# Altium PCB Fingerboardv2.PcbDoc
Units mil, origin at the board's own origin, x right, y up, seen from the top; angles counter-clockwise.
Board outline 628 x 1500 mil, 2 copper layers (Top Layer, Bottom Layer); 12 components, 14 nets, 70 pads, 13 vias.
Unrouted connection lines stored in the file: 15.
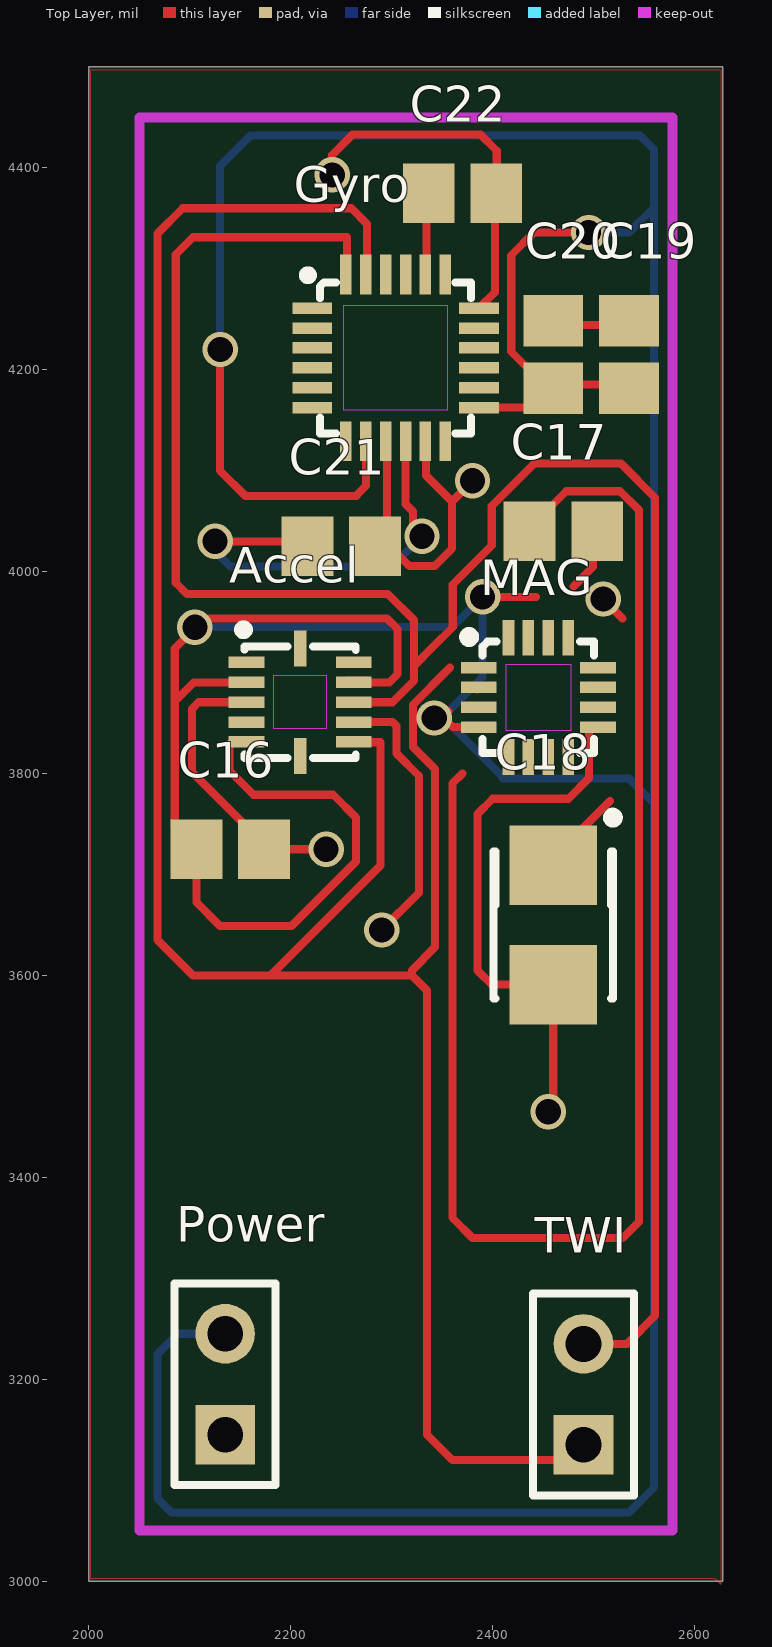
[diagram p0: Top Layer view]
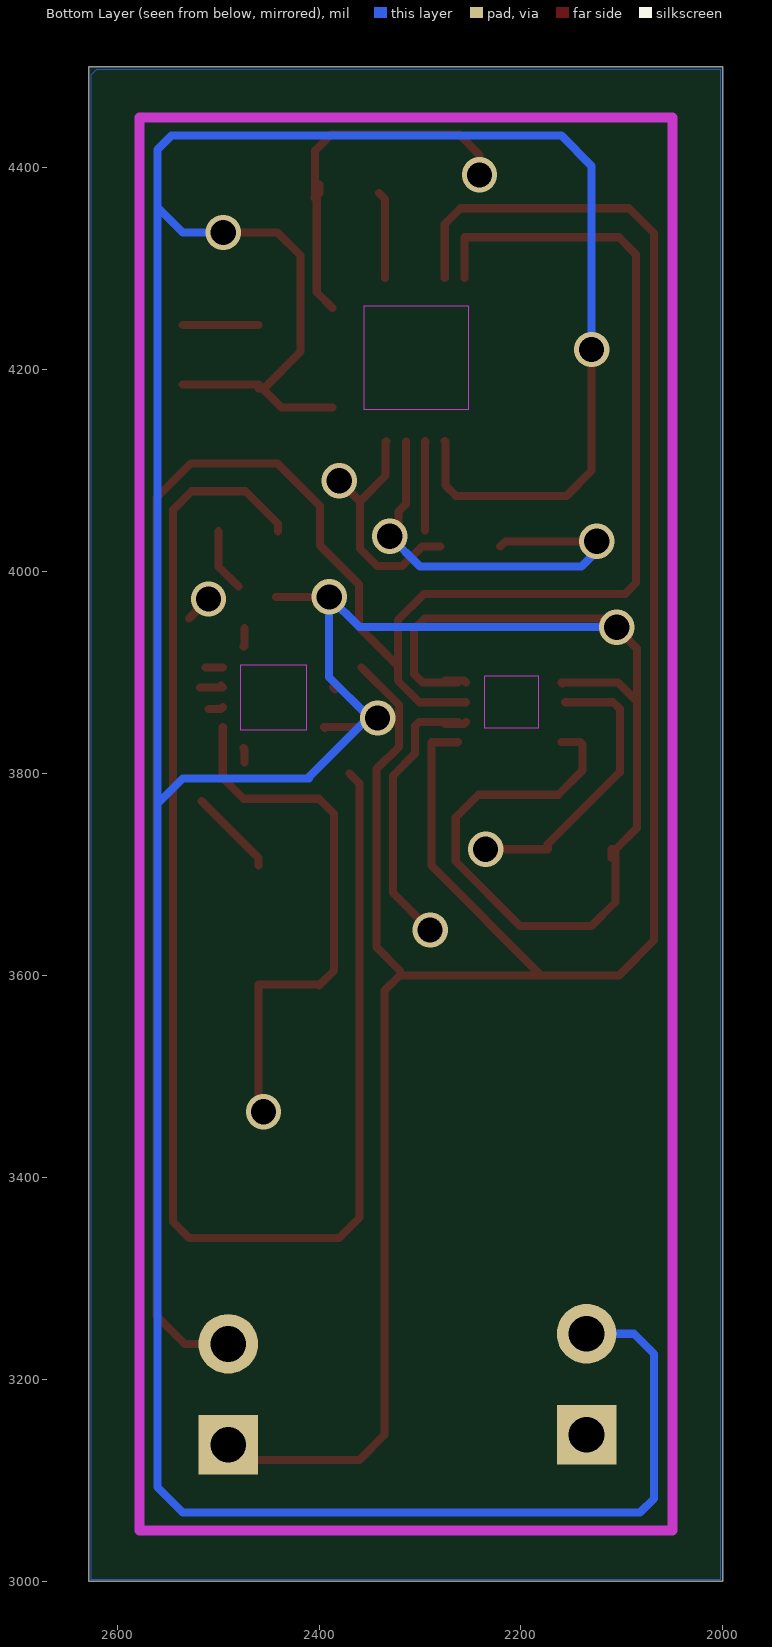
[diagram p1: Bottom Layer view, seen from below]

## Layer stack, top to bottom
Top Layer: signal copper 1.4
Dielectric: dielectric 12.6, FR-4, Dk 4.8
Bottom Layer: signal copper 1.4

## Board outline
2000,3000 2628,3000 2628,4500 2000,4500

## Design rules (kind name [scope] priority, off if disabled: settings)
Clearance "Polygon Clearance" [InPolygon] p1: gap=10
Clearance [All] p2: gap=8.1
HoleSize [All] p1: absolutevalues=TRUE maxlimit=100 minlimit=24 maxpercent=80.000 minpercent=20.000
PolygonConnect [All] p1: connectstyle=Relief reliefconductorwidth=10 reliefentries=4 polygonreliefangle="90 Angle"
RoutingVias [All] p1: holewidth=25 width=35 viastyle="Through Hole" minholewidth=25 minwidth=35 maxholewidth=25 maxwidth=35
SilkscreenOverComponentPads [All] p1: minsilkscreentomaskgap=10
SolderMaskExpansion [All] p1: expansion=4
Width [All] p1: maxlimit=8 minlimit=8 preferedwidth=8
26 further rules are at their usual default settings.

## Classes and differential pairs
component class U_BMA180: Accel C16
component class Fingerboard: Power TWI
component class U_HMC5883L: C17 C18 MAG
component class U_IMU3000: C19 C20 C21 C22 Gyro
net class AUX_TWI[1..0]: AUX_TWI0 AUX_TWI1
net class TWI[1..0]: TWI0 TWI1

## Components (designator, comment, footprint, x,y, rotation, side; value= is the part's Value field where it differs from the comment)
Accel "BMA180" "BMA180 - ECESHOP" 2162,3910 r270 top
C16 "Cap Semi" CAPC2012N 2140,3725 r180 top
C17 "Cap Semi" CAPC2012N 2470,4040 r0 top
C18 "Cap Pol1" TC3528-1411 2460,3650 r270 top
C19 "Cap Semi" CAPC2012N 2535,4215 r270 top
C20 "Cap Semi" CAPC2012N 2460,4215 r270 top
C21 "Cap Semi" CAPC2012N 2250,4025 r180 top
C22 "Cap Semi" CAPC2012N 2370,4375 r180 top
Gyro "IMU3000" "IMU3000 - ECESHOP" 2233,4261 r0 top
MAG "HMC5883L" "HMC5883L - ECESHOP" 2395,3905 r0 top
Power "Header 2" HDR1X2 2135,3145 r90 top
TWI "TWI" HDR1X2 2490,3135 r90 top

## Footprints (in the part's own frame and the unit in brackets; to place one, negate y for a bottom-side part, rotate by r counter-clockwise, add the part's x,y. Pads: shape width x height; smd on the part's side, far side on the other; paste and mask are expansions set on the pad)
"BMA180 - ECESHOP" [mm] "BMA180 - ECESHOP"
  rect 0.29x0.9 smd: 1(0,-0.15) 2(0.5,-0.15) 3(1,-0.15) 4(1.5,-0.15) 5(2,-0.15) 7(2,2.55) 8(1.5,2.55) 9(1,2.55) 10(0.5,2.55) 11(0,2.55)
  rect 0.9x0.32 smd: 6(2.35,1.2) 12(-0.35,1.2)
  Keep-Out Layer region: 0.328,0.524 1.658,0.524 1.658,1.876 0.328,1.876
  silkscreen extent -0.91,-0.31 2.4,2.6
CAPC2012N [mm] "Chip Capacitor, Body 2.0x1.3mm, IPC Medium Density"
  rect 1.3x1.5 smd: 1(-0.85,0) 2(0.85,0)
  body extent -1.1,-0.72 1.1,0.72, height 1.1
HDR1X2 [mm] "Connector; Header; 2 Position"
  rect 1.5x1.5 hole 0.9: 1(0,0)
  round 1.5 hole 0.9: 2(2.54,0)
  silkscreen extent -1.27,-1.27 3.81,1.27
"HMC5883L - ECESHOP" [mm]
  rect 0.9x0.29 smd: 1(-0.225,0) 2(-0.225,-0.5) 3(-0.225,-1) 4(-0.225,-1.5) 9(2.775,-1.5) 10(2.775,-1) 11(2.775,-0.5) 12(2.775,0)
  rect 0.29x0.9 smd: 5(0.525,-2.25) 6(1.025,-2.25) 7(1.525,-2.25) 8(2.025,-2.25) 13(2.025,0.75) 14(1.525,0.75) 15(1.025,0.75) 16(0.525,0.75)
  Keep-Out Layer region: 0.452,-1.572 2.099,-1.572 2.099,0.075 0.452,0.075
  silkscreen extent -0.57,-2.15 2.67,0.87
"IMU3000 - ECESHOP" [mm]
  rect 1x0.29 smd: 1(-0.3,0) 2(-0.3,-0.5) 3(-0.3,-1) 4(-0.3,-1.5) 5(-0.3,-2) 6(-0.3,-2.5) 13(3.9,-2.5) 14(3.9,-2) 15(3.9,-1.5) 16(3.9,-1) 17(3.9,-0.5) 18(3.9,0)
  rect 0.29x1 smd: 7(0.55,-3.35) 8(1.05,-3.35) 9(1.55,-3.35) 10(2.05,-3.35) 11(2.55,-3.35) 12(3.05,-3.35) 19(3.05,0.85) 20(2.55,0.85) 21(2.05,0.85) 22(1.55,0.85) 23(1.05,0.85) 24(0.55,0.85)
  Keep-Out Layer region: 0.488,-2.562 3.109,-2.562 3.109,0.066 0.488,0.066
  silkscreen extent -0.48,-3.15 3.7,0.9
TC3528-1411 [mm] "Capacitor, SM Tantalum; Body 3.5 x 2.8 mm (LxW typ)"
  rect 2x2.2 smd: 1(-1.5,0) 2(1.5,0)
  silkscreen extent -2.82,-1.5 1.85,1.63

## Part data
C16 C17 C19 C20 C21 C22: "Capacitor (Semiconductor SIM Model)"
C18: "Polarized Capacitor (Radial)"
Power: "Header, 2-Pin"
TWI: library part "Header 2", "Header, 2-Pin"

## Via types
v1: diameter 35, hole 25, Top Layer to Bottom Layer, 13 vias

## Nets (pads, with @x,y where several pads share a name; then routed paths per layer and width w, separated by ;. In a path a pad name is that pad's centre, name@x,y a point inside that pad or via, vN(x,y) a via of type N, cw(c..) or ccw(c..) an arc to the next point about the centre after c; other vN are vias at no path point)
3.3VCC: Accel.2 Accel.5 Accel.10 C16.2 C19.2 C20.2 Gyro.8 Gyro.13 MAG.2 MAG.4 MAG.13 Power.2 | length 5460.8
  Top Layer w8: 2085.02,3847 2085.02,3924 2105,3943.98 v1(2105,3945) 2113.6,3953.6 2295.3,3953.6 2305.9,3943 2305.9,3898.65 2297.57,3890.32 Accel.10 ; C16.2@2110.47,3716.46 C16.2@2110.47,3725 ; C16.2@2110.47,3717.84 C16.2@2110.47,3725 ; v1(2130,4220) 2130,4100 2155,4075 2265,4075 2265,4075.61 2274.69,4085.31 2274.69,4128.51 Gyro.8@2275.47,4129.29 ; Accel.2@2159.02,3889.34 2160,3890.32 2103.88,3890.32 2085.04,3871.48 2085.04,3746 2106.04,3725 C16.2 ; Accel.5@2160,3831.26 Accel.5 2141.26,3831.26 2139,3829 2139,3803 2163,3779 2242,3779 2264.6,3756.4 2264.6,3712.74 2200.86,3649 2130,3649 2106.54,3672.46 C16.2 ; Accel.10@2254.49,3890.32 2256.36,3892.19 Accel.10@2275.25,3892.19 ; v1@2356.33,3861.67 2350.55,3855.89 2360.49,3845.95 2395,3845.95 MAG.4@2394.05,3845 ; MAG.2@2384.27,3883.44 MAG.2 ; Gyro.13 2437.1,4162.57 C20.2@2456.06,4181.54 ; v1(2390,3975) 2442.82,3975 ; C20.2 C20.2@2456.06,4181.54 ; MAG.13@2473.91,3943.91 2473.91,3926.48 MAG.13@2474.72,3925.67 ; v1(2495,4336) 2485.15,4336 2441,4336 2418.37,4313.37 2418.37,4217.86 2454.7,4181.54 C20.2@2456.06,4181.54 ; C19.2@2535,4185.47 2460,4185.47 C20.2@2456.06,4181.54 ; C16.2 C16.2@2110.47,3725 ; MAG.13@2474.72,3925.67 2474.02,3926.53 2473.95,3926.45 MAG.13@2474.72,3925.67
  Bottom Layer w8: v1(2105,3945) 2360,3945 v1(2390,3975) 2390,3895.35 2350.55,3855.89 2410,3796.44 2410,3795 2535,3795 2559.98,3770.02 ; v1(2130,4220) 2130,4402 2159.98,4431.98 2546,4431.98 2559.98,4418 2559.98,4360.98 ; Power.2 2088,3245 2068.02,3225.02 2068.02,3082 2082,3068.02 2535,3068.02 2559.98,3093 2559.98,3770.02 ; v1(2495,4336) 2535,4336 2559.98,4360.98 ; 2559.98,3770.02 2559.98,4360.98
  other v1: 2342,3855
AUX_TWI0: Gyro.7
AUX_TWI1: Gyro.6
GND: Accel.3 Accel.8 C16.1 C18.2 C19.1 C20.1 C21.1 C22.1 Gyro.9 Gyro.11 Gyro.18 MAG.9 MAG.11 Power.1 | length 1964.6
  Top Layer w8: Accel.3 2108.63,3870.63 2102,3864 2102,3801.1 2102.67,3801.1 2173.46,3730.3 C16.1 v1(2235,3725) ; v1@2242.13,4391.87 v1(2241,4393) 2241,4412.9 2261,4432.9 2388.1,4432.9 2404,4417 2404,4375.54 C22.1 ; Accel.8@2254.49,3850.95 2256.36,3849.07 Accel.8@2275.25,3849.07 ; Accel.8 2300.9,3850.95 2304.85,3847 2304.85,3819.78 2326.81,3797.81 ; C21.1@2279.53,4025 2298.14,4025 2317.74,4005.4 2342.26,4005.4 2359.6,4022.74 2359.6,4069.6 ; v1(2290,3645) 2326.88,3681.88 2326.88,3797.44 ; Gyro.9@2294.38,4128.51 2295.16,4129.29 C21.1@2295.16,4040.63 ; Gyro.11 2334,4128.5 2334,4095.2 2359.6,4069.6 ; v1(2380,4090) 2359.6,4069.6 ; Gyro.18 2402.27,4276.73 C22.1@2402.27,4372.26 ; C22.1@2399.53,4383.54 C22.1@2399.53,4375 ; v1(2455,3465) 2460,3470 C18.2 2400.94,3590.94 2400,3590 2385,3605 2385,3760 2400,3775 2475,3775 2495.39,3795.39 MAG.9@2495.39,3845.95 ; C20.1@2460,4244.53 C19.1@2535,4244.53 ; MAG.11@2497.17,3887.09 2495.39,3885.32 MAG.11@2518.01,3885.32 ; v1(2509.5,3972.95) 2528.7,3953.75 ; C22.1@2399.53,4375 C22.1@2402.27,4372.26 ; C22.1@2399.53,4375 2404.4,4370.13 C22.1 ; C22.1@2402.27,4372.26 2402.27,4373.81 C22.1
NetAccel_4: Accel.4
NetC17_1: C17.1 MAG.8 | length 1496.6
  Top Layer w8: 2370,3800 2360,3790 2360,3360 2380,3340 2528.8,3340 2544.8,3356 2544.8,4061.05 2526.19,4079.66 2472.86,4079.66 2440.47,4047.27 C17.1@2440.47,4040 ; MAG.8@2473.95,3811.03 2473.95,3824.5 2474.72,3825.28 MAG.8@2475,3825
NetC17_2: C17.2 MAG.12 | length 80.1
  Top Layer w8: 2479.9,3985.21 2499.53,4004.84 C17.2@2499.53,4040 ; MAG.12@2495.39,3905 MAG.12@2512.6,3905
NetC18_1: C18.1 MAG.10 | length 104.1
  Top Layer w8: C18.1 2460,3716.27 2516.35,3772.62 ; MAG.10@2497.17,3863.85 2495.39,3865.63 2497.27,3863.75 MAG.10@2509.26,3863.75
NetC21_2: C21.2 Gyro.10 | length 432
  Top Layer w8: v1(2125,4030) 2215.47,4030 C21.2@2220.47,4025 ; Gyro.10 2313.71,4066.99 2321.16,4059.54 2321.16,4043.84 v1(2330,4035)
  Bottom Layer w8: v1(2125,4030) 2125,4020 2140,4005 2300,4005 v1(2330,4035)
NetC22_2: C22.2 Gyro.20 | length 86.8
  Top Layer w8: Gyro.20@2334.53,4290.71 2334.53,4369.06 C22.2@2340.47,4375
NetGyro_12: Gyro.12
NetINT_3: MAG.15
TWI0: Accel.7 Gyro.23 MAG.1 TWI.1 | length 2518.7
  Top Layer w8: Accel.7 2262.65,3831 2288.75,3831 2288.75,3708.75 2180,3600 ; Gyro.23@2275.47,4290.71 2275.47,4344.53 2260,4360 2093,4360 2068.02,4335.02 2068.02,3634.98 2103,3600 2180,3600 ; 2357.79,3905 2320.95,3868.15 2320.95,3826.45 2342.98,3804.42 2342.98,3628 2320,3605.02 2320,3600 ; TWI.1 2475,3120 2360,3120 2335,3145 2335,3585 2320,3600 ; 2180,3600 2320,3600
TWI1: Accel.9 Gyro.24 MAG.16 TWI.2 | length 2206.6
  Top Layer w8: Accel.9@2254.49,3870.63 Accel.9 2300.65,3870.63 2322,3891.98 2322,3906.54 ; Gyro.24@2255.79,4290.71 2255.79,4331.21 2103,4331.21 2086.04,4314.25 2086.04,3988.96 2097,3978 2296.04,3978 2322,3952.04 2322,3906.54 ; TWI.2 2533,3235 2560.9,3262.9 2560.9,4073.17 2527.05,4107.02 2441.17,4107.02 2399.11,4064.96 2399.11,4025.97 2360.4,3987.26 2360.4,3944.94 2341.13,3925.67 2322,3906.54
pads on no net: Accel.1 Accel.6 Accel.11 Accel.12 Gyro.1 Gyro.2 Gyro.3 Gyro.4 Gyro.5 Gyro.14 Gyro.15 Gyro.16 Gyro.17 Gyro.19 Gyro.21 Gyro.22 MAG.3 MAG.5 MAG.6 MAG.7 MAG.14

## Polygon pours and split planes (outlines as drawn)
GND on Bottom Layer "Bottom Layer-GND" (solid, shelved, pour order 4): 2002,4497 2620.71,4497 2626,4491.9 2626,3002 2002,3002
GND on Top Layer "Top Layer-GND" (solid, shelved, pour order 2): 2002,4497 2626,4497 2626,2997 2620.71,3002.14 2002,3002.14

## Keep-outs
Keep-Out Layer:
  lines w10: 2050,3050 2578,3050 2578,4450 2050,4450 2050,3050

## Dimensions
2050,3050 to 2578,3050 on Mechanical 1
2050,3050 to 2050,4450 on Mechanical 1